# EAGLE board frets-input (EAGLE 6.6.0)

Size 100 x 80 mm. Coordinates in mm from the lower left corner, seen from the top.
Outline: 0,0 100,0 100,80 0,80 0,0
Copper layers (1*16): Top 0.035mm / dielectric 1.5mm / Bottom 0.035mm
Design rules "default": minimum track width 10mil, minimum drill 24mil, track to track 8mil, track to pad 8mil, pad to pad 8mil, via to via 8mil, smd to smd 8mil, copper to edge 40mil, drill to drill 8mil, minimum pad ring 10mil, minimum via ring 8mil, stop-mask expansion 4mil, vias tented up to drill 0mil, thermal gap 10mil

## Footprints (pad centres in the part's own frame; a part is rotated, then mirrored left to right if it is on the bottom)
1X02 = drill 1.016 long: 1 -1.27,0; 2 1.27,0
1X04 = drill 1.016 long: 1 -3.81,0; 2 -1.27,0; 3 1.27,0; 4 3.81,0
DO35-2 = drill 0.9: A 2.54,0 | drill 0.9 square: C -2.54,0
1X06 = drill 1.016 long: 1 -6.35,0; 2 -3.81,0; 3 -1.27,0; 4 1.27,0; 5 3.81,0; 6 6.35,0
1X05 = drill 1.016 long: 1 -5.08,0; 2 -2.54,0; 3 0,0; 4 2.54,0; 5 5.08,0
1X01 = drill 1.016 octagon: 1 0,0
TO92- = drill 0.7 octagon: 1 2.54,0; 2 0,0; 3 -2.54,0
R0207/1V = drill 0.7: 1 -1.27,0; 2 1.27,0
R0207/3 = drill 0.7: 1 -3.81,0; 2 3.81,0

## Placement (x,y rotation side)
ANALOG  [1X02]  -41.91,27.94 0 top  (outside the outline)
AUX  [1X02]  -55.88,27.94 0 top  (outside the outline)
BROWN  [1X04]  -46.99,21.59 0 top  (outside the outline)
D1  1N4148-2  [DO35-2]  -19.05,40.64 0 top  (outside the outline)
D4  1N4148-2  [DO35-2]  -29.21,40.64 0 top  (outside the outline)
D5  1N4148-2  [DO35-2]  -39.37,40.64 0 top  (outside the outline)
D6  1N4148-2  [DO35-2]  -49.53,40.64 0 top  (outside the outline)
D7  1N4148-2  [DO35-2]  -19.05,45.72 0 top  (outside the outline)
D8  1N4148-2  [DO35-2]  -29.21,45.72 0 top  (outside the outline)
D9  1N4148-2  [DO35-2]  -39.37,45.72 0 top  (outside the outline)
D10  1N4148-2  [DO35-2]  -49.53,45.72 0 top  (outside the outline)
D_IN  [1X06]  -29.21,8.89 0 top  (outside the outline)
DPAD  [1X05]  -20.32,15.24 0 top  (outside the outline)
DPAD2  [1X01]  -55.88,33.02 0 top  (outside the outline)
JP1  [1X04]  -19.05,27.94 0 top  (outside the outline)
JP2  [1X04]  -30.48,27.94 0 top  (outside the outline)
JP3  [1X06]  -45.72,8.89 0 top  (outside the outline)
ORANGE  [1X05]  -34.29,15.24 0 top  (outside the outline)
POTS  [1X05]  -48.26,15.24 0 top  (outside the outline)
POTS2  [1X02]  -49.53,27.94 0 top  (outside the outline)
Q1  2N3904  [TO92-]  -17.78,3.81 0 top  (outside the outline)
Q2  2N3904  [TO92-]  -26.67,3.81 0 top  (outside the outline)
Q3  2N3904  [TO92-]  -35.56,3.81 0 top  (outside the outline)
Q4  2N3904  [TO92-]  -44.45,3.81 0 top  (outside the outline)
Q5  2N3904  [TO92-]  -53.34,3.81 0 top  (outside the outline)
Q6  2N3904  [TO92-]  -17.78,10.16 0 top  (outside the outline)
R1  300k  [R0207/1V]  -22.86,34.29 0 top  (outside the outline)
R2  1k  [R0207/3]  -17.78,50.8 0 top  (outside the outline)
R3  300k  [R0207/1V]  -29.21,34.29 0 top  (outside the outline)
R4  1k  [R0207/3]  -27.94,50.8 0 top  (outside the outline)
R5  300k  [R0207/1V]  -35.56,34.29 0 top  (outside the outline)
R6  1k  [R0207/3]  -38.1,50.8 0 top  (outside the outline)
R7  300k  [R0207/1V]  -41.91,34.29 0 top  (outside the outline)
R8  1k  [R0207/3]  -48.26,50.8 0 top  (outside the outline)
R9  300k  [R0207/1V]  -48.26,34.29 0 top  (outside the outline)
R10  1k  [R0207/3]  -17.78,55.88 0 top  (outside the outline)
R11  300k  [R0207/1V]  -16.51,34.29 0 top  (outside the outline)
R12  1k  [R0207/3]  -27.94,55.88 0 top  (outside the outline)
R13  30k  [R0207/3]  -38.1,55.88 0 top  (outside the outline)
R16  30k  [R0207/3]  -48.26,55.88 0 top  (outside the outline)
R17  30k  [R0207/3]  -17.78,60.96 0 top  (outside the outline)
R18  30k  [R0207/3]  -27.94,60.96 0 top  (outside the outline)
R19  30k  [R0207/3]  -38.1,60.96 0 top  (outside the outline)
R20  30k  [R0207/3]  -48.26,60.96 0 top  (outside the outline)
R21  30k  [R0207/3]  -17.78,66.04 0 top  (outside the outline)
R22  30k  [R0207/3]  -27.94,66.04 0 top  (outside the outline)
RED  [1X05]  -20.32,21.59 0 top  (outside the outline)
YELLOW  [1X05]  -34.29,21.59 0 top  (outside the outline)

## Library data of the parts
ANALOG AUX BROWN D_IN DPAD DPAD2 JP1-JP3 ORANGE POTS POTS2 RED YELLOW = pinhead
D1 D4-D10 = gm-diodes
Q1-Q6 = gm-trans
R1-R13 R16-R22 = gm-resistors

## Nets
BACK: R18.1
D0: D_IN.1 Q3.1 RED.5
D1: D_IN.2 ORANGE.5 Q2.1
D2: D_IN.3 Q1.1 RED.4
D3: D_IN.4 Q6.1 RED.3
D4: D_IN.5 Q5.1 RED.2
D5: D_IN.6 Q4.1 RED.1
D_DOWN: DPAD.1 R22.1
D_LEFT: DPAD.2 R20.1
D_RIGHT: DPAD.3 R21.1
D_UP: DPAD.4 R19.1
GND: BROWN.1 DPAD2.1 JP3.6 POTS2.1 Q1.3 Q2.3 Q3.3 Q4.3 Q5.3 Q6.3 R1.2 R3.2 R5.2 R7.2 R9.2 R11.2
M_F1: JP1.1 YELLOW.4
M_F2: JP1.2 YELLOW.3
M_F3: JP1.3 YELLOW.2
M_F4: JP1.4 YELLOW.1
M_F5: JP2.1 ORANGE.4
M_F6: JP2.2 ORANGE.3
M_F7: JP2.3 ORANGE.2
M_F8: JP2.4 ORANGE.1
M_F9: BROWN.4 JP3.1
M_F10: JP3.2 YELLOW.5
M_F11: BROWN.3 JP3.3
M_F12: BROWN.2 JP3.4
N$2: Q2.2 R3.1 R4.2
N$3: AUX.2 R10.1
N$4: D5.C D9.C R4.1
N$5: Q3.2 R5.1 R6.2
N$6: Q1.2 R1.1 R2.2
N$7: D6.C D8.C R2.1
N$8: D4.A R16.2
N$9: D5.A R17.2
N$10: D4.C D7.C R6.1
N$11: Q4.2 R7.1 R8.2
N$12: D6.A R18.2
N$13: AUX.1 R8.1
N$14: Q5.2 R9.1 R10.2
N$15: D1.A R13.2
N$18: Q6.2 R11.1 R12.2
N$20: D1.C D10.C R12.1
N$21: D7.A R19.2
N$22: D8.A R20.2
N$23: D9.A R21.2
N$24: D10.A R22.2
ORNG: JP3.5 POTS2.2
POT_A: ANALOG.2 POTS.2
POT_B: ANALOG.1 POTS.1
SIDE_B: POTS.5 R17.1
START: POTS.3 R13.1
X_BUTTON: DPAD.5 R16.1

## Tracks (layer width: path | path; a pad name or v marks a point on that pad's centre or on a via)
D0  (2 unrouted)
D1  (2 unrouted)
D2  (2 unrouted)
D3  (2 unrouted)
D4  (2 unrouted)
D5  (2 unrouted)
D_DOWN  (1 unrouted)
D_LEFT  (1 unrouted)
D_RIGHT  (1 unrouted)
D_UP  (1 unrouted)
GND  (15 unrouted)
M_F1  (1 unrouted)
M_F2  (1 unrouted)
M_F3  (1 unrouted)
M_F4  (1 unrouted)
M_F5  (1 unrouted)
M_F6  (1 unrouted)
M_F7  (1 unrouted)
M_F8  (1 unrouted)
M_F9  (1 unrouted)
M_F10  (1 unrouted)
M_F11  (1 unrouted)
M_F12  (1 unrouted)
N$2  (2 unrouted)
N$3  (1 unrouted)
N$4  (2 unrouted)
N$5  (2 unrouted)
N$6  (2 unrouted)
N$7  (2 unrouted)
N$8  (1 unrouted)
N$9  (1 unrouted)
N$10  (2 unrouted)
N$11  (2 unrouted)
N$12  (1 unrouted)
N$13  (1 unrouted)
N$14  (2 unrouted)
N$15  (1 unrouted)
N$18  (2 unrouted)
N$20  (2 unrouted)
N$21  (1 unrouted)
N$22  (1 unrouted)
N$23  (1 unrouted)
N$24  (1 unrouted)
ORNG  (1 unrouted)
POT_A  (1 unrouted)
POT_B  (1 unrouted)
SIDE_B  (1 unrouted)
START  (1 unrouted)
X_BUTTON  (1 unrouted)